# Altium PCB PCB-Mod.PcbDoc (part 2 of 2)
Units mil, origin at the board's own origin, x right, y up, seen from the top; angles counter-clockwise.
Board outline 2755.91 x 1181.1 mil, 4 copper layers (Top Layer, Layer 2, Layer 3, Bottom Layer), stack 61.865 mil thick; 89 components, 59 nets, 279 pads, 158 vias.
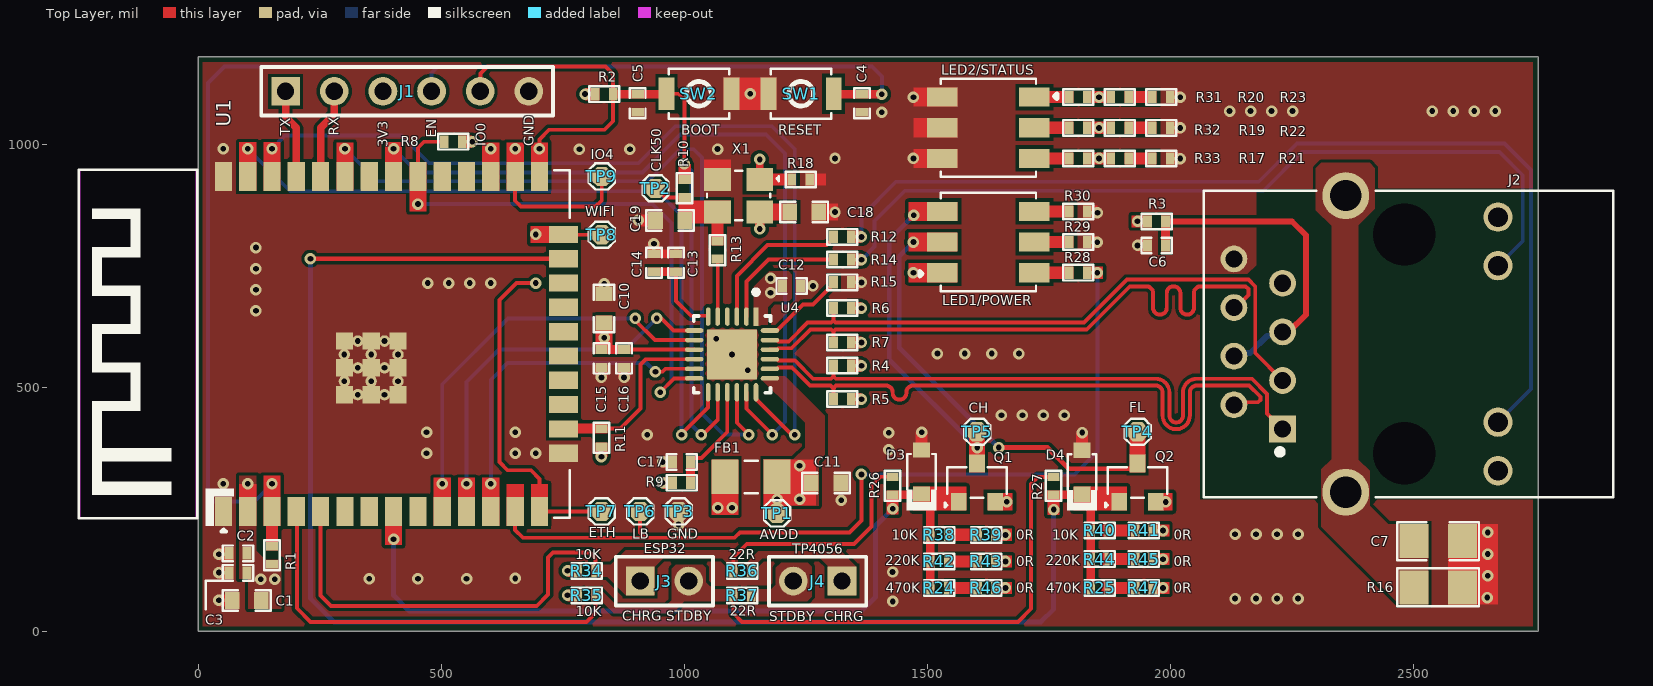
[diagram p0: Top Layer view]

## Part data (continued)
R24 R25: library part RC0402FR-07470KL, "RES 470K OHM 1% 1/16W 0402", Case Code (Imperial)=0402, Case Code (Metric)=1005, LCSC Part Number=C137976, Manufacturer=Yageo, Max Operating Temperature=155°C, Max Power Dissipation=63mW, Min Operating Temperature=-55°C, Package Quantity=1, Power Rating=62.5mW, Resistance Tolerance=1%, Resistor Type="Thick Film", Supplier Part Number=7702467, Temperature Coefficient=100ppm/°C, Voltage Rating=50V, Case/Package=0402, Category="Chip SMD Resistors", ComponentLink1Description=https://datasheet.ciiva.com/11819/0900766b80c66297-11819514.pdf?src-supplier=Rs, ComponentLink1URL=https://datasheet.ciiva.com/11819/0900766b80c66297-11819514.pdf?src-supplier=Rs, ComponentLink2Description=https://datasheet.ciiva.com/46412/1018594-46412837.pdf?src-supplier=Element14, ComponentLink2URL=https://datasheet.ciiva.com/46412/1018594-46412837.pdf?src-supplier=Element14, ComponentLink3Description=https://datasheet.ciiva.com/2453/pyu-r-int-thick-7-2453434.pdf?src-supplier=Digi-Key, ComponentLink3URL=https://datasheet.ciiva.com/2453/pyu-r-int-thick-7-2453434.pdf?src-supplier=Digi-Key, ComponentLink4Description=https://datasheet.ciiva.com/2453/pyu-r-int-thick-7-2453435.pdf?src-supplier=Digi-Key, ComponentLink4URL=https://datasheet.ciiva.com/2453/pyu-r-int-thick-7-2453435.pdf?src-supplier=Digi-Key, ComponentLink5Description=https://datasheet.ciiva.com/2453/pyu-r-int-thick-7-2453433.pdf?src-supplier=Digi-Key, ComponentLink5URL=https://datasheet.ciiva.com/2453/pyu-r-int-thick-7-2453433.pdf?src-supplier=Digi-Key, ComponentLink6Description=https://datasheet.ciiva.com/7850/1018594-7850012.pdf?src-supplier=Element14, ComponentLink6URL=https://datasheet.ciiva.com/7850/1018594-7850012.pdf?src-supplier=Element14, ComponentLink7Description=https://datasheet.ciiva.com/7850/1018594-7850013.pdf?src-supplier=Element14, ComponentLink7URL=https://datasheet.ciiva.com/7850/1018594-7850013.pdf?src-supplier=Element14, ComponentLink8Description=https://datasheet.ciiva.com/15189/getdatasheetpartid-325138-15189462.pdf?src-supplier=Verical, ComponentLink8URL=https://datasheet.ciiva.com/15189/getdatasheetpartid-325138-15189462.pdf?src-supplier=Verical, Construction=Rectangular, Depth=0.5mm, Features="Moisture Resistant", Height=0.016inch, Item Type=Resistor, Lead Free=5697LeadFree, Length=0.039inch, Manufacturer Part Number=RC0402FR-07470KL, Military Standard=Not, Number of Terminations=2, Packaging="Tape and Reel", Pins=2, Pricing="10000=0.0009, 50000=0.0008, 300000=0.0008, 1000000=0.0007, 3000000=0.0007 (USD)", Reach SVHC Compliant=No, RoHS=Yes, RoHS Compliant=Yes, Series=RC, Stock=330000, Supplier="Future Electronics", Technology="THICK FILM", Termination=SMD/SMT, Tolerance=1%, Voltage Rating (AC)=50V, Voltage Rating (DC)=50V, Width=0.02inch
R28 R29 R30 R31 R32 R33: library part RC0402FR-07100RL, "RES 100 OHM 1% 1/16W 0402", Case Code (Imperial)=0402, Case Code (Metric)=1005, LCSC Part Number=C106232, Manufacturer=Yageo, Max Operating Temperature=155°C, Max Power Dissipation=63mW, Min Operating Temperature=-55°C, Power Rating=62.5mW, Resistance Tolerance=1%, Resistor Type="Thick Film", Supplier Part Number 1=603-RC0402FR-07100RL, Temperature Coefficient=100ppm/°C, Voltage Rating=50V, Case/Package=0402, Category="Chip SMD Resistors", ComponentLink1Description=https://datasheet.ciiva.com/11808/0900766b80c66297-11808765.pdf?src-supplier=RSComponents, ComponentLink1URL=https://datasheet.ciiva.com/11808/0900766b80c66297-11808765.pdf?src-supplier=RSComponents, ComponentLink2Description=https://datasheet.ciiva.com/7849/1784430-7849810.pdf?src-supplier=Element14, ComponentLink2URL=https://datasheet.ciiva.com/7849/1784430-7849810.pdf?src-supplier=Element14, ComponentLink3Description=https://datasheet.ciiva.com/28367/1018594-28367226.pdf?src-supplier=Element14, ComponentLink3URL=https://datasheet.ciiva.com/28367/1018594-28367226.pdf?src-supplier=Element14, ComponentLink4Description=https://datasheet.ciiva.com/22747/1018594-22747511.pdf?src-supplier=Element14, ComponentLink4URL=https://datasheet.ciiva.com/22747/1018594-22747511.pdf?src-supplier=Element14, ComponentLink5Description=https://datasheet.ciiva.com/12667/pyu-rc0402-51-rohs-l-6-r-12667957.pdf?src-supplier=Mouser, ComponentLink5URL=https://datasheet.ciiva.com/12667/pyu-rc0402-51-rohs-l-6-r-12667957.pdf?src-supplier=Mouser, ComponentLink6Description=https://datasheet.ciiva.com/15189/getdatasheetpartid-329466-15189335.pdf?src-supplier=Verical, ComponentLink6URL=https://datasheet.ciiva.com/15189/getdatasheetpartid-329466-15189335.pdf?src-supplier=Verical, ComponentLink7Description=https://datasheet.ciiva.com/16740/pyu-rc0402-51-rohs-l-6-r-16740566.pdf?src-supplier=Future+Electronics, ComponentLink7URL=https://datasheet.ciiva.com/16740/pyu-rc0402-51-rohs-l-6-r-16740566.pdf?src-supplier=Future+Electronics, Construction=Rectangular, Depth=0.5mm, Features="Moisture Resistant", Height=0.32mm, Item Type=Resistor, Lead Free="Lead Free", Length=1mm, Manufacturer Part Number=RC0402FR-07100RL, Military Standard=Not, Number of Pins=2, Number of Terminations=2, Packaging="Tape and Reel", Pricing 1="1=0.10000, 10=0.01200, 50=0.01200, 100=0.00500, 1000=0.00300, 2500=0.00200, 10000=0.00100 (USD)", REACH SVHC="No SVHC", Resistance=100R, RoHS=Yes, RoHS Compliant=Yes, Series=RC, Size Code=0402, Stock 1=699545, Supplier 1=Mouser, Technology="THICK FILM", Termination=SMD/SMT, Tolerance=1%, Voltage Rating (DC)=50V, Width=0.5mm
R34 R35: library part RC0402FR-07100KL, "RES 100K OHM 1% 1/16W 0402", Case Code (Imperial)=0402, Case Code (Metric)=1005, LCSC Part Number=C60491, Manufacturer=Yageo, Max Operating Temperature=155°C, Max Power Dissipation=63mW, Min Operating Temperature=-55°C, Package Quantity=1, Resistance=100kR, Resistance Tolerance=1%, Resistor Type="Thick Film", Supplier Part Number 1=603-RC0402FR-07100KL, Temperature Coefficient=100ppm/°C, Voltage Rating=50V, Case/Package=0402, Category="Chip SMD Resistors", ComponentLink1Description=https://datasheet.ciiva.com/11819/0900766b80c66297-11819452.pdf?src-supplier=RSComponents, ComponentLink1URL=https://datasheet.ciiva.com/11819/0900766b80c66297-11819452.pdf?src-supplier=RSComponents, ComponentLink2Description=https://datasheet.ciiva.com/22747/1018594-22747509.pdf?src-supplier=Element14, ComponentLink2URL=https://datasheet.ciiva.com/22747/1018594-22747509.pdf?src-supplier=Element14, ComponentLink3Description=https://datasheet.ciiva.com/2453/pyu-r-int-thick-7-2453362.pdf?src-supplier=Digi-Key, ComponentLink3URL=https://datasheet.ciiva.com/2453/pyu-r-int-thick-7-2453362.pdf?src-supplier=Digi-Key, ComponentLink4Description=https://datasheet.ciiva.com/2453/pyu-r-int-thick-7-2453363.pdf?src-supplier=Digi-Key, ComponentLink4URL=https://datasheet.ciiva.com/2453/pyu-r-int-thick-7-2453363.pdf?src-supplier=Digi-Key, ComponentLink5Description=https://datasheet.ciiva.com/2453/pyu-r-int-thick-7-2453361.pdf?src-supplier=Digi-Key, ComponentLink5URL=https://datasheet.ciiva.com/2453/pyu-r-int-thick-7-2453361.pdf?src-supplier=Digi-Key, ComponentLink6Description=https://datasheet.ciiva.com/12667/pyu-rc0402-51-rohs-l-6-r-12667930.pdf?src-supplier=Mouser, ComponentLink6URL=https://datasheet.ciiva.com/12667/pyu-rc0402-51-rohs-l-6-r-12667930.pdf?src-supplier=Mouser, ComponentLink7Description=https://datasheet.ciiva.com/15189/getdatasheetpartid-323696-15189334.pdf?src-supplier=Verical, ComponentLink7URL=https://datasheet.ciiva.com/15189/getdatasheetpartid-323696-15189334.pdf?src-supplier=Verical, Construction=Rectangular, Depth=0.5mm, Features="Moisture Resistant", Height=0.016inch, Item Type=Resistor, Lead Free="Lead Free", Length=0.039inch, Manufacturer Part Number=RC0402FR-07100KL, Military Standard=Not, Number of Terminations=2, Packaging="Tape and Reel", Power Rating=63mW, Pricing 1="1=0.10000, 10=0.01200, 50=0.01200, 100=0.00500, 1000=0.00300, 2500=0.00200, 10000=0.00100 (USD)", REACH SVHC="No SVHC", RoHS=Yes, RoHS Compliant=Yes, Series=RC, Stock 1=7759549, Supplier 1=Mouser, Technology="THICK FILM", Termination=SMD/SMT, Tolerance=1%, Width=0.02inch, Working Voltage=50V
R36 R37: library part RC0402FR-0722RL, "RES 22 OHM 1% 1/16W 0402", Case Code (Imperial)=0402, Case Code (Metric)=1005, LCSC Part Number=C114765, Manufacturer=Yageo, Max Operating Temperature=155°C, Max Power Dissipation=63mW, Min Operating Temperature=-55°C, Power Rating=62.5mW, Resistance Tolerance=1%, Resistor Type="Thick Film", Temperature Coefficient=100ppm/°C, Voltage Rating=50V, Case/Package=0402, Category="Chip SMD Resistors", ComponentLink1Description=https://datasheet.ciiva.com/11819/0900766b80c66297-11819462.pdf?src-supplier=RSComponents, ComponentLink1URL=https://datasheet.ciiva.com/11819/0900766b80c66297-11819462.pdf?src-supplier=RSComponents, ComponentLink2Description=https://datasheet.ciiva.com/7849/1018594-7849912.pdf?src-supplier=Element14, ComponentLink2URL=https://datasheet.ciiva.com/7849/1018594-7849912.pdf?src-supplier=Element14, ComponentLink3Description=https://datasheet.ciiva.com/7849/1018594-7849911.pdf?src-supplier=Element14, ComponentLink3URL=https://datasheet.ciiva.com/7849/1018594-7849911.pdf?src-supplier=Element14, ComponentLink4Description=https://datasheet.ciiva.com/16930/pyu-rc0402-51-rohs-l-6-r-16930687.pdf?src-supplier=Future+Electronics, ComponentLink4URL=https://datasheet.ciiva.com/16930/pyu-rc0402-51-rohs-l-6-r-16930687.pdf?src-supplier=Future+Electronics, ComponentLink5Description=https://datasheet.ciiva.com/26829/getdatasheetpartid-554995-26829991.pdf?src-supplier=Verical, ComponentLink5URL=https://datasheet.ciiva.com/26829/getdatasheetpartid-554995-26829991.pdf?src-supplier=Verical, Construction=Rectangular, Depth=0.5mm, Features="Moisture Resistant", Height=0.32mm, Item Type=Resistor, Lead Free="Lead Free", Length=1mm, Manufacturer Part Number=RC0402FR-0722RL, Military Standard=Not, Number of Pins=2, Number of Terminations=2, Packaging="Tape and Reel", Pricing 1="10000=0.00085 (USD)", Reach SVHC Compliant=Yes, Resistance=22R, RoHS=Yes, RoHS Compliant=Yes, Series=RC, Size Code=0402, Stock 1=1810000, Supplier 1=Avnet, Supplier Part Number 1=RC0402FR-0722RL, Technology="THICK FILM", Termination=SMD/SMT, Tolerance=1%, Voltage Rating (DC)=50V, Width=0.5mm
R42 R44: library part RC0402FR-07220KL, "RES 220K OHM 1% 1/16W 0402", Case Code (Imperial)=0402, Case Code (Metric)=1005, LCSC Part Number=C138030, Manufacturer=Yageo, Max Operating Temperature=155°C, Max Power Dissipation=63mW, Min Operating Temperature=-55°C, Package Quantity=1, Power Rating=62.5mW, Resistance=220kR, Resistance Tolerance=1%, Resistor Type="Thick Film", Temperature Coefficient=100ppm/°C, Voltage Rating=50V, Case/Package=0402, Category="Chip SMD Resistors", ComponentLink1Description=https://datasheet.ciiva.com/11808/0900766b80c66297-11808792.pdf?src-supplier=RSComponents, ComponentLink1URL=https://datasheet.ciiva.com/11808/0900766b80c66297-11808792.pdf?src-supplier=RSComponents, ComponentLink2Description=https://datasheet.ciiva.com/5924/1018594-5924944.pdf?src-supplier=Farnell, ComponentLink2URL=https://datasheet.ciiva.com/5924/1018594-5924944.pdf?src-supplier=Farnell, ComponentLink3Description=https://datasheet.ciiva.com/2453/pyu-r-int-thick-7-2453533.pdf?src-supplier=Digi-Key, ComponentLink3URL=https://datasheet.ciiva.com/2453/pyu-r-int-thick-7-2453533.pdf?src-supplier=Digi-Key, ComponentLink4Description=https://datasheet.ciiva.com/2453/pyu-r-int-thick-7-2453534.pdf?src-supplier=Digi-Key, ComponentLink4URL=https://datasheet.ciiva.com/2453/pyu-r-int-thick-7-2453534.pdf?src-supplier=Digi-Key, ComponentLink5Description=https://datasheet.ciiva.com/2453/pyu-r-int-thick-7-2453532.pdf?src-supplier=Digi-Key, ComponentLink5URL=https://datasheet.ciiva.com/2453/pyu-r-int-thick-7-2453532.pdf?src-supplier=Digi-Key, ComponentLink6Description=https://datasheet.ciiva.com/12577/pyu-rc0402-51-rohs-l-6-r-12577270.pdf?src-supplier=Mouser, ComponentLink6URL=https://datasheet.ciiva.com/12577/pyu-rc0402-51-rohs-l-6-r-12577270.pdf?src-supplier=Mouser, Construction=Rectangular, Depth=0.5mm, Features="Moisture Resistant", Height=0.016inch, Item Type=Resistor, Lead Free="Lead Free", Length=1mm, Manufacturer Part Number=RC0402FR-07220KL, Military Standard=Not, Number of Terminations=2, Packaging="Tape and Reel", Pricing 1="10000=0.00130 (USD)", Reach SVHC Compliant=Yes, RoHS=Yes, RoHS Compliant=Yes, Series=RC, Size Code=0402, Stock 1=210000, Supplier 1="Arrow Electronics", Supplier Part Number 1=RC0402FR-07220KL, Technology="THICK FILM", Termination=SMD/SMT, Tolerance=1%, Weight=2.3E-05oz, Width=0.02inch
SW1 SW2: "SWITCH TACTILE SPST-NO 0.05A 12V", Contact Current Rating=50mA, Contact Resistance=100mR, Insulation Resistance=100MR, LCSC Part Number=C231329, Manufacturer=Omron, Max Operating Temperature=70°C, Max Voltage Rating (DC)=12V, Min Operating Temperature=-25°C, Operating Force=1.5N, Package Quantity=1, Ratings="Dust Proof,IP40", Supplier Part Number 1=SW1020DKR-ND, Actuator Length=0.4mm, Actuator Type=Standard, ComponentLink1Description=http://www.farnell.com/datasheets/60838.pdf?src-supplier=Farnell, ComponentLink1URL=http://www.farnell.com/datasheets/60838.pdf?src-supplier=Farnell, ComponentLink2Description=http://www.farnell.com/datasheets/60838.pdf?src-supplier=Element14, ComponentLink2URL=http://www.farnell.com/datasheets/60838.pdf?src-supplier=Element14, ComponentLink3Description=https://omronfs.omron.com/en_US/ecb/products/pdf/en-b3u.pdf?src-supplier=Digi-Key, ComponentLink3URL=https://omronfs.omron.com/en_US/ecb/products/pdf/en-b3u.pdf?src-supplier=Digi-Key, ComponentLink4Description=http://www.omron.com/ecb/products/pdf/en-b3u.pdf?src-supplier=Digi-Key, ComponentLink4URL=http://www.omron.com/ecb/products/pdf/en-b3u.pdf?src-supplier=Digi-Key, ComponentLink5Description=https://www.distrelec.biz/Web/Downloads/he/et/B3U_eng_datasheet.pdf?mime=application%2Fpdf&src-supplier=Distrelec, ComponentLink5URL=https://www.distrelec.biz/Web/Downloads/he/et/B3U_eng_datasheet.pdf?mime=application%2Fpdf&src-supplier=Distrelec, ComponentLink6Description=http://www.onlinecomponents.com/productFiles/mf-OM/en-b3u.pdf?src-supplier=Onlinecomponents.com, ComponentLink6URL=http://www.onlinecomponents.com/productFiles/mf-OM/en-b3u.pdf?src-supplier=Onlinecomponents.com, ComponentLink7Description=https://www.verical.com/server-webapp/html/getDatasheet?partID=552554&src-supplier=Verical, ComponentLink7URL=https://www.verical.com/server-webapp/html/getDatasheet?partID=552554&src-supplier=Verical, ComponentLink8Description=http://www.farnell.com/datasheets/1685550.pdf?src-supplier=Element14, ComponentLink8URL=http://www.farnell.com/datasheets/1685550.pdf?src-supplier=Element14, ComponentLink9Description=http://www.farnell.com/datasheets/2610940.pdf?src-supplier=Farnell, ComponentLink9URL=http://www.farnell.com/datasheets/2610940.pdf?src-supplier=Farnell, ComponentLink10Description=https://www.alliedelec.com/m/d/4c8a9ef82804fc3c241a13c1e298fd73.pdf?src-supplier=Allied+Electronics, ComponentLink10URL=https://www.alliedelec.com/m/d/4c8a9ef82804fc3c241a13c1e298fd73.pdf?src-supplier=Allied+Electronics, Contact Material=Silver, Current Rating=50mA, Depth=2.5mm, Electrical Life=200000Cycles, Height=1.2mm, Illumination Type=Non-Illuminated,Illuminated, Item Type=Switch, Lead Free="Lead Free", Length=4mm, Manufacturer Part Number=B3U-1000P, Max Current Rating=50mA, Mechanical Life=200000Cycles, Mount="Surface Mount", Orientation=Straight, Packaging="Tape and Reel", Pricing 1="1=1, 10=0.961, 25=0.9064, 50=0.7976, 100=0.7251, 250=0.68888, 500=0.67074, 1000=0.52571 (USD)", REACH SVHC=Unknown, Stock 1=116454, Supplier 1=Digi-Key, Switch Function=Off-Mom, Switch Travel=0.15mm, Termination=SMD/SMT, Throw Configuration=SPST, Voltage Rating (DC)=12V, Weight=0.000776oz, Width=3mm
TP1 TP2 TP3 TP4 TP5 TP6 TP7 TP8 TP9: "Test Point ON", Item Type="Test Point", Manufacturer Part Number="TEST POINT 0.5mm Dia"
U1: "RX TXRX MOD WIFI TRACE ANT SMD", LCSC Part Number=C701341, Manufacturer="Espressif Systems", Supplier Part Number 1=1965-ESP32-WROOM-32E(4MB)CT-ND, ComponentLink1Description="LCSC Link", ComponentLink1URL=https://lcsc.com/product-detail/WiFi-Modules_ESPRESSIF-ESP32-WROOM-32E-N4_C701341.html, Manufacturer Part Number=ESP32-WROOM-32E-N4, Pricing 1="1=3.00000 (USD)", RoHS=No, Supplier 1=Digi-Key
U4: "IC TRANSCEIVER FULL 2/2 24SQFN", LCSC Part Number=C45223, Manufacturer=MICROCHIP, Max Operating Temperature=85°C, Min Operating Temperature=0°C, Package=QFN-24-EP(4x4), ComponentLink1Description="LCSC Link", ComponentLink1URL=https://www.lcsc.com/product-detail/C45223.html?s_z=n_LAN8720A, Item Type=RMII, Manufacturer Part Number=LAN8720A-CP-TR, Mount="Surface Mount", Packaging="Tape and Reel", Simplex/Duplex="Full Duplex"
X1: library part OT2EL4C4JI-111OLP-50M, "1.8V~3.3V ±10ppm ±20ppm CMOS 50MHz SMD3225-4P Crystal Oscillators ROHS", LCSC Part Number=C5203552, Manufacturer="YXC Crystal Oscillators", Package=SMD3225-4P, ComponentLink1Description="LCSC Link", ComponentLink1URL=https://lcsc.com/product-detail/Crystal-Oscillators_YXC-Crystal-Oscillators-OT2EL4C4JI-111OLP-50M_C5203552.html, Item Type=Crystal, Manufacturer Part Number=OT2EL4C4JI-111OLP-50M

## Via types
v1: diameter 23.62, hole 11.81, Top Layer to Bottom Layer, tented top, 157 vias
v2: diameter 23.62, hole 11.81, Top Layer to Bottom Layer, 1 vias

## Nets (pads, with @x,y where several pads share a name; then routed paths per layer and width w, separated by ;. In a path a pad name is that pad's centre, name@x,y a point inside that pad or via, vN(x,y) a via of type N, cw(c..) or ccw(c..) an arc to the next point about the centre after c; other vN are vias at no path point)
+3.3_OUT: C1.1 C2.2 C3.2 C10.2 C15.1 C16.1 C18.2 FB1.2 J1.3 LED1/POWER.1 Q1.2 Q2.2 R1.2 R2.2 R8.2 R9.2 R11.2 R34.2 R35.2 R39.1 R41.1 R43.1 R45.1 R46.1 R47.1 U1.2 U4.9 X1.4 | length 179.2
  Top Layer w8: C16.1 876.41,579.07 1019.99,579.07 U4.9
  Top Layer w20: v1(1154.76,826.98) X1.4
  other v1: 759.85,73.79 1660.15,88.68 1984.15,88.68 128.81,106.5 157.49,106.5 759.85,124.2 1660.15,143.18 1984.15,147.68 1660.15,197.68 1984.15,206.68 1068.97,253.68 1098,253.68 1662.6,265.89 1989.65,265.57 101.97,303.02 955.11,305.1 829.37,358.35 835,603.24 1471,737 563.59,1006.06 795.85,1104.43
AVDD: C11.2 C12.1 FB1.1 J2.9 J2.12 R3.2 R4.2 R5.2 R6.2 R7.2 TP1.1 U4.1 U4.19
  other v1: 1190.5,271 1236.78,271 1236.78,340.24 1364,476.7 1364,545.51 1364,593.5 1364,664 1177.25,695.78 1177.25,725.14 1931.85,842.84
CH: LED1/POWER.5 Q1.3 TP5.1 | length 605.8
  Top Layer w8: v1(1602,377.52) TP5.1
  Bottom Layer w10: v1(1471.81,855.05) 1421.24,804.48 1421.24,558.27 v1(1602,377.52)
CHG_LED: D3.1 Q1.1 R24.1 R26.2 R38.2 R42.1 U1.8 | length 1471.8
  Top Layer w8: R26.2 1486.11,280.5 D3.1 1517.87,281.98 1533.97,265.89 Q1.1
  Bottom Layer w10: v1(401.97,189.1) 401.97,73.4 434.37,41 1364,41 1393,70 1393,216.15 v1(1428.35,251.49)
CHRG: J3.1 R26.1 R34.1 R36.1 U1.5 | length 1342
  Top Layer w8: U1.5 251.97,73.03 273,52 696.46,52 719.69,75.22 719.69,151.69 730,162 806.06,162 817.5,150.56 R34.1 ; R36.1 1100.5,151.48 1128.21,179.19 1348.92,179.19 1385,215.27 1385,299 1403.5,317.5 R26.1
CLK50M: C19.2 R10.1 R13.1 TP2.1 X1.3 | length 67.7
  Top Layer w8: TP2.1 942.44,910.39 960.94,891.89 R10.1
EN: C4.1 J1.4 R1.1 SW1.2 U1.3 | length 2541.6
  Top Layer w8: C4.1 v1(1406,1104.11)
  Bottom Layer w8: v1(151.97,303.02) 115.78,266.84 33.59,266.84 20,280.42 20,1127 54,1161 493.12,1161 ; J1.4 480,1147.88 493.12,1161 ; v1(1406,1104.11) 1406,1140.61 1385.61,1161 493.12,1161
ETH2X_LED1: J2.10 R12.2 | length 2050.7
  Bottom Layer w8: v1(1364,810.51) 1364,852.54 1435.46,924 2181,924 2260,1003 2686,1003 2741.12,947.88 2741.12,497.81 J2.10
ETH2X_LED2: J2.11 R14.2 | length 1709.1
  Bottom Layer w8: v1(1364,763.51) 1391.27,790.77 1391.27,843.32 1453.46,905.51 2190.51,905.51 2270,985 2676,985 2724,937 2724,802.35 J2.11
ETHERNET: R20.2 R31.2 TP7.1 U1.14 | length 2226.3
  Top Layer w8: v1(694.22,715.75) 654.86,715.75 619.69,680.57 619.69,347.61 636.58,330.71 684.25,330.71 701.97,312.99 U1.14 TP7.1
  Layer 3 w8: v1(694.22,715.75) 694.22,773.93 834.3,914 1872.91,914 1904,945.09 1904,1046.7 v1(1852.71,1097.99)
FL: LED1/POWER.3 Q2.3 TP4.1 | length 859.4
  Top Layer w8: 1932,377.52 TP4.1
  Top Layer w10: v1(1646.62,377.52) 1746.45,377.52 1789.96,334.01 1920.98,334.01 Q2.3
  Bottom Layer w10: v1(1471,799.99) 1441.72,770.71 1441.72,582.41 v1(1646.62,377.52)
FULL_LED: D4.1 Q2.1 R25.1 R27.2 R40.2 R44.1 U1.23 | length 3125.9
  Top Layer w8: R27.2@1758,280.5 1816.11,280.5 1817.6,281.98 1847.87,281.98 1863.97,265.89 Q2.1
  Top Layer w10: v2(231,765.75) U1.23
  Bottom Layer w10: v2(231,765.75) 231,67.35 279.35,19 1733,19 1759.35,45.35 v1(1759.35,249.94)
GND: C1.2 C2.1 C3.1 C4.2 C5.2 C6.1 C7.1 C10.1 C11.1 C12.2 C13.1 C14.2 C15.2 C16.2 C17.1 C18.1 C19.1 D3.2 D4.2 J1.6 J2.8 LED2/STATUS.2 LED2/STATUS.4 LED2/STATUS.6 R15.1 R16.1 R18.2 R21.1 R22.1 R23.1 R29.2 R30.2 SW1.1 SW2.1 TP3.1 U1.1 U1.15 U1.38 U1.39 U1.39_10 U1.39_11 U1.39_12 U1.39_13 U1.39_14 U1.39_15 U1.39_16 U1.39_17 U1.39_18 U1.39_19 U1.39_20 U1.39_21 U1.40 U1.41 U1.42 U1.43 U1.44 U1.45 U1.46 U1.47 U4.25 X1.2
  other v1: 1428.35,60.97 42.85,63.32 2132.39,67 2175.59,67 2218.8,67 2262,67 2651,69 351.97,107.51 451.97,107.51 551.97,107.51 651.97,108.25 2652,113.67 42.85,120.32 1428.01,121.56 42.85,158.32 2652,158.33 2132.39,199 2175.59,199 2218.8,199 2262,199 2652,203 988.01,219.22 1322.66,268.92 51.97,303.02 955.11,347.82 469.69,365.5 651.97,365.5 694.22,365.75 1420.44,372.54 923.76,404 1420.44,407.83 1817.91,408.2 469.69,408.7 651.97,408.7 1487.91,408.94 1651.94,444 1695.15,444 1738.35,444 1781.56,444 829.37,521.65 875.87,521.65 1130.37,536.63 1098,569 1520.4,570.72 1576.27,570.72 1632.13,570.72 1687.99,570.72 1065.63,601.37 119,659 119,702.2 1264.41,709.89 835,714.26 472.36,715.75 515.56,715.75 558.76,715.75 601.97,715.75 1364,717.01 119,745.41 119,788.61 1931.85,793.19 937.42,796.68 1849.15,799.68 904.92,844.8 1849.37,860.19 1309.67,861.77 1309.67,972.01 1471,972 2019.65,971.69 784.2,991 888.04,991 1068.14,991.2 51.97,992 2019.65,1034.68 1406,1067.11 2120.92,1069.5 2164.13,1069.5 2207.33,1069.5 2250.53,1069.5 2537.91,1069.5 2581.11,1069.5 2624.32,1069.5 2667.52,1069.5 1471,1097.98 2019.65,1097.68 1135.51,1105
IO0: C5.1 J1.5 R2.1 R10.2 SW2.2 U1.25 U4.14 | length 1543
  Top Layer w8: J1.5 580.84,1110.84 580.84,1146.84 595,1161 837.75,1161 853.5,1145.25 R2.1 853.5,1048.5 836,1031 721.65,1031 701.97,1011.32 U1.25 ; SW2.2 987.43,1105 1000.57,1091.85 R10.2 ; v1(1034.43,404) 1038.34,404 1068.47,434.13 U4.14
  Bottom Layer w8: v1(1000,961) 1014.57,946.43 1014.57,423.86 v1(1034.43,404)
  other v1: 701.97,992
IO4: R17.2 R33.2 TP9.1 U1.26 | length 1539.5
  Top Layer w8: U1.26 651.97,885.03 664,873 817.39,873 830,885.61 TP9.1
  Layer 3 w8: v1(651.97,992) 702.8,1042.83 1783.1,1042.83 1852.71,973.23 v1(1852.71,972.01)
IO13_RMII_EMAC_RX_ER: R11.1 U1.16 U4.10 | length 338.9
  Top Layer w8: 796.68,416.5 829.69,416.5 868.5,416.5 910,458 910,548.03 921.13,559.16 U4.10 ; R11.1 R11.1@833.19,416
IO16_OSC_EN: R18.1 U1.27 X1.1 | length 653.1
  Top Layer w15: X1.1 v1(1154.76,970)
  Layer 3 w8: v1(601.97,992) 631.96,962.01 711.01,962.01 771.51,1022.51 1102.25,1022.51 v1(1154.76,970)
IO18_RMII_MDIO: R8.1 U1.30 U4.12 | length 1094.6
  Top Layer w8: U1.30 451.97,993.88 464.47,1006.38 R8.1 ; v1(950.35,491.22) 978.91,519.79 U4.12
  Bottom Layer w8: v1(451.97,878.08) 934.17,878.08 973.41,838.84 973.41,514.29 v1(950.35,491.22)
IO19_RMII_EMAC_TXD0: U1.31 U4.17 | length 1572.4
  Top Layer w8: U4.17 1127.53,457.18 v1(1180.71,404)
  Bottom Layer w8: v1(401.97,992) 450.88,943.09 913.46,943.09 991.55,1021.17 1168.2,1021.17 1207.21,982.16 1207.21,430.5 v1(1180.71,404)
IO21_RMII_EMAC_TX_EN: U1.33 U4.16 | length 1533.6
  Top Layer w8: U4.16 1107.84,428.4 v1(1132.24,404)
  Bottom Layer w8: v1(301.97,992) 368.81,925.16 924.85,925.16 990.63,990.94 1018.7,990.94 1036,973.64 1036,447.88 1079.88,404 v1(1132.24,404)
IO22_RMII_EMAC_TXD1: U1.36 U4.18 | length 1872.3
  Top Layer w8: U4.18 1147.21,477.01 1220.23,404 v1(1227.03,404)
  Bottom Layer w8: v1(151.97,992) 179.11,1019.14 417.86,1019.14 474.99,962.01 905.92,962.01 982.04,1038.13 1179.87,1038.13 1227.03,990.97 v1(1227.03,404)
IO23_RMII_MDC: U1.37 U4.13 | length 1509.4
  Top Layer w8: v1(994.27,404) 994.27,405.45 1048.79,459.97 U4.13
  Bottom Layer w8: v1(101.97,992) 189.55,904.42 944.13,904.42 994.27,854.29 v1(994.27,404)
IO25_RMII_EMAC_RXD0: U1.10 U4.8 | length 799.7
  Top Layer w8: v1(899,643) 899,639 939.47,598.53 U4.8
  Bottom Layer w8: v1(501.97,303.02) 501.97,507.69 637.28,643 v1(899,643)
IO26_RMII_EMAC_RXD1: U1.11 U4.7 | length 731.9
  Top Layer w8: v1@953,643 977.79,618.21 U4.7
  Bottom Layer w8: v1(551.97,303.02) 551.97,512.17 618.8,579 879,579 v1(943,643)
IO27_RMII_EMAC_CRS_DV: U1.12 U4.11 | length 646.4
  Top Layer w8: v1@950.35,533.3 954.57,533.3 960.75,539.47 U4.11
  Bottom Layer w8: v1(601.97,303.02) 601.97,516.88 636.38,551.3 922.35,551.3 v1(940.35,533.3)
"LOW BATT": R28.2 TP6.1 U1.13 | length 1796.8
  Top Layer w8: U1.13 651.97,208.03 668,192 1103,192 1114,203 1339.76,203 1364,227.24 v1(1364,322.28) ; TP6.1 909,202.89 919.89,192
  Bottom Layer w8: v1(1364,322.28) 1801.86,322.28 1849.15,369.57 v1(1849.15,736.69)
NetC6_2: C6.2 J2.4 J2.5 R3.1 | length 647
  Top Layer w12: R3.1 2249.48,842.52 2278,814 2278,650.51 2242.85,615.35 J2.5
  Bottom Layer w12: J2.4 2136.89,572.13 2163.23,572.13 2198.34,607.24 2222,607.24 J2.5
NetC7_2: "J2.Shield 1" "J2.Shield 2" C7.2 R16.2
NetJ4_1: J4.1 R36.2
NetJ4_2: J4.2 R37.2
NetLED1_2: LED1/POWER.2 R28.1 | length 72.1
  Top Layer w8: LED1/POWER.2@1719.38,737.01 R28.1
NetLED1_4: LED1/POWER.4 R29.1 | length 72.1
  Top Layer w8: LED1/POWER.4@1719.38,800 R29.1
NetLED1_6: LED1/POWER.6 R30.1 | length 72.1
  Top Layer w8: LED1/POWER.6@1719.38,862.99 R30.1
NetLED2_1: LED2/STATUS.1 R31.1 | length 72.1
  Top Layer w8: LED2/STATUS.1 R31.1
NetLED2_3: LED2/STATUS.3 R32.1 | length 72.1
  Top Layer w8: LED2/STATUS.3 R32.1
NetLED2_5: LED2/STATUS.5 R33.1 | length 44.1
  Top Layer w8: LED2/STATUS.5 1760.05,972.01 ; R33.1 R33.1@1791.61,975.51
NetR12_1: R12.1 U4.3 | length 317.4
  Top Layer w8: U4.3 1107.84,730.29 1171.17,793.61 1292.64,793.61 1306.35,807.32 R12.1
NetR14_1: R14.1 U4.2 | length 269.5
  Top Layer w8: U4.2 1127.53,718.8 1172.55,763.82 R14.1
NetR15_2: R15.2 U4.24 | length 173.2
  Top Layer w8: U4.24 1190.35,618.21 1243.82,671.68 1264.05,671.68 1301.2,708.82 1301.35,708.82 1306.03,713.51 R15.2@1306.03,717.01
NetR17_1: R17.1 R21.2 | length 48.2
  Top Layer w8: R17.1 R21.2
NetR19_1: R19.1 R22.2 | length 48.2
  Top Layer w8: R19.1 R22.2
NetR20_1: R20.1 R23.2 | length 48.2
  Top Layer w8: R20.1 R23.2
NetR24_2: R24.2 R46.2 | length 60
  Top Layer w8: R24.2 R46.2
NetR25_2: R25.2 R47.2 | length 54
  Top Layer w8: R25.2 R47.2
NetR38_1: R38.1 R39.2 | length 60
  Top Layer w8: R38.1 R39.2
NetR40_1: R40.1 R41.2 | length 54
  Top Layer w8: R40.1 R41.2
NetR42_2: R42.2 R43.2 | length 60
  Top Layer w8: R42.2 R43.2
NetR44_2: R44.2 R45.2 | length 54
  Top Layer w8: R44.2 R45.2
nRST: C17.2 R9.1 U4.15 | length 185
  Top Layer w8: C17.2 1012.77,351 1017.77,356 1035,356 1088.16,409.16 U4.15
OSCIN: R13.2 U4.5 | length 118.3
  Top Layer w8: R13.2 1068.47,764.62 U4.5
RX_N: J2.6 R7.1 U4.22 | length 1303.6
  Top Layer w8: U4.22 1190.37,578.84 1193.21,581.68 1220.45,581.68 1259.27,620.51 1301.66,620.51 1306.35,615.82 ; R7.1 1306.35,615.82 ; J2.6 2133.94,665.35 2159.8,691.21 2159.8,703.24 2154.04,709 2095.7,709 2061.8,709 ccw(c2061.8,695) 2047.8,695 2047.8,664.74 cw(c2033.8,664.74) 2019.8,664.74 2019.8,695 ccw(c2005.8,695) 1991.8,695 1991.8,664.74 cw(c1977.8,664.74) 1963.8,664.74 1963.8,695 ccw(c1949.8,695) 1949.8,709 1917.8,709 1915.8,709 1827.31,620.51 1311.03,620.51 1306.35,615.82
RX_P: J2.3 R6.1 U4.23 | length 1303.7
  Top Layer w8: U4.23 1190.37,598.53 1193.21,595.68 1214.65,595.68 1253.47,634.51 1301.66,634.51 1306.35,639.2 ; R6.1 1306.35,639.2 ; J2.3 2173.8,571.67 2173.8,709.04 2159.84,723 1981.22,723 1910,723 1864.87,677.87 1821.51,634.51 1311.03,634.51 1306.35,639.2
RXD: J1.2 U1.34 | length 186.6
  Top Layer w15: U1.34 251.97,1035 280,1063.03 J1.2
STDBY: J3.2 R27.1 R35.1 R37.1 U1.4 | length 1845.7
  Top Layer w8: U1.4 203,245.03 203,47 231,19 799,19 817.5,37.5 R35.1 ; R37.1 1100.5,37 1118.5,19 1686,19 1713,46 1713,303 1727.23,317.23 R27.1
TX_N: J2.2 R5.1 U4.20 | length 1303.8
  Top Layer w8: U4.20 1190.37,539.47 1193.21,542.31 1221.23,542.31 1258.61,504.93 1300.83,504.93 1306.49,499.27 ; R5.1 1306.35,495.56 1306.4,495.61 1306.4,499.19 1312.09,504.87 1382.35,504.87 1414.35,504.87 cw(c1414.35,490.87) 1428.35,490.87 1428.35,490 ccw(c1442.35,490) 1456.35,490 1456.35,490.87 cw(c1470.35,490.87) 1470.35,504.87 1499.74,504.87 1899.54,504.87 1969.31,504.87 cw(c1969.31,490.87) 1983.31,490.87 1983.31,443.15 ccw(c2011.31,443.15) 2039.31,443.15 2039.31,490.87 cw(c2053.31,490.87) 2053.31,504.87 2064.31,504.87 2161.34,504.87 2184.33,481.89 2184.33,475.26 2179.64,470.57 2135.34,470.57 J2.2
TX_P: J2.1 R4.1 U4.21 | length 1310.8
  Top Layer w8: U4.21 1190.37,559.16 1193.21,556.31 1227.03,556.31 1264.41,518.93 1301.66,518.93 1306.35,523.62 1306.35,527.29 ; R4.1 1306.35,527.29 ; J2.1 2206.6,438.87 2198.33,447.14 2198.33,487.69 2167.14,518.87 2064.31,518.87 2053.31,518.87 ccw(c2053.31,490.87) 2025.31,490.87 2025.31,443.15 cw(c2011.31,443.15) 1997.31,443.15 1997.31,490.87 ccw(c1969.31,490.87) 1969.31,518.87 1899.54,518.87 1376.55,518.87 1311.18,518.87 1306.4,523.66 1306.4,527.23 1306.35,527.29
TXD: J1.1 U1.35 | length 184.1
  Top Layer w15: J1.1 180,1056.97 201.97,1035 U1.35
VDDCR: C13.2 C14.1 U4.6 | length 139.8
  Top Layer w8: C13.2 983.07,678.61 1013.07,648.61 1048.13,648.61 1048.79,647.95 U4.6
WIFI: R19.2 R32.2 TP8.1 U1.24 | length 1417.4
  Top Layer w8: U1.24 751.93,815 TP8.1
  Layer 3 w8: v1(694.22,815.75) 812.13,933.66 1860.56,933.66 1882.91,956.01 1882.91,1004.8 v1@1852.71,1035
  other v1: 1852.71,1034.68
pads on no net: J2.7 J2.MH1 J2.MH2 U1.6 U1.7 U1.9 U1.17 U1.18 U1.19 U1.20 U1.21 U1.22 U1.28 U1.29 U1.32 U4.4

## Polygon pours and split planes (outlines as drawn)
GND on Top Layer "NONET_L-01_P-001" (solid, pour order 25): 2175.45,910 2175.45,752.63 2157.64,734.81 2060,734.81 2060,270 2295,270 2335,230 2385,230 2425,270 2745,270 2745,10 10,10 10,1170 2745,1170 2745,911 2428.17,911 2389.17,950 2330.91,950 2290.91,910
+3.3_OUT on Top Layer "NONET_L-01_P-001" (solid, pour order 13): 84.25,186.77 84.25,319.65 119.69,319.65 119.69,164.89 138.07,146.5 171.38,146.5 171.38,45.5 103.44,45.5 103.01,107.51 84.25,107.51
GND on Top Layer "NONET_L-01_P-001" (solid, pour order 28): 33.02,904.7 33.83,905.51 69.69,905.51 69.69,1005.45 34.25,1005.45 34.25,905.51
GND on Top Layer "NONET_L-01_P-001" (solid, pour order 27): 781.52,346.8 780.71,347.61 780.71,383.46 694.22,383.46 694.22,348.03 780.71,348.03
GND on Top Layer "NONET_L-01_P-001" (solid, pour order 26): 33.02,215.72 33.83,216.54 69.69,216.54 69.69,319.65 34.25,319.65 34.25,216.54
AVDD on Top Layer "NONET_L-01_P-001" (solid, pour order 20): 1171.17,665.67 1183.33,677.83 1214.99,677.83 1221.23,684.07 1221.23,733.13 1214.22,740.14 1174.76,740.14 1142.5,707.89 1142.5,627.86 1171.17,627.86
AVDD on Top Layer "NONET_L-01_P-001" (solid, pour order 21): 1248.49,428.15 1248.49,377.47 1224.13,353.11 1162.99,353.11 1162.99,258.21 1276.16,258.21 1276.16,349.55 1289.07,362.47 1289.07,443 1207.58,524.5 1161.57,524.5 1161.57,515.08 1219.52,457.13
NetC7_2 on Top Layer "NONET_L-01_P-001" (solid, pour order 19): 2466,59 2470,55 2530,55 2530,220 2447,220 2409,258 2409,329.76 2386,352.76 2386,834.45 2420,868.45 2420,952 2409,963 2310,963 2310,962.69 2298.77,951.46 2298.77,865.23 2330.91,833.09 2330.91,353.91 2310,333 2310,215
STDBY on Top Layer "NONET_L-01_P-001" (solid, pour order 8): 808.5,60.97 830.56,60.97 831.51,60.01 854.53,37 976,37 999.97,60.97 1109.5,60.97 1109.5,85.97 1058.92,85.97 1044.23,100.66 1044.23,129.84 1037.47,136.6 981.84,136.6 973.93,128.69 973.93,63.07 962.86,52 860.47,52 826.5,85.97 808.5,85.97
CHRG on Top Layer "NONET_L-01_P-001" (solid, pour order 7): 808.5,111.38 841.57,111.38 879.47,73.47 938.53,73.47 938.53,132.53 956,150 1077.88,150 1091.5,136.38 1091.5,111.38 1109.5,111.38 1109.5,147.5 1090.27,166.73 879.35,166.73 849,136.38 808.5,136.38
NetJ4_1 on Top Layer "NONET_L-01_P-001" (solid, pour order 9): 1294.47,73.47 1353.53,73.47 1353.53,132.53 1322.08,163.97 1151.47,163.97 1128.5,141 1128.5,111.38 1146.5,111.38 1146.5,136.38 1160.1,149.98 1279.34,149.98 1294.47,134.85 1294.47,132.53
NetJ4_2 on Top Layer "NONET_L-01_P-001" (solid, pour order 10): 1128.5,85.97 1178.66,85.97 1187.77,95.08 1187.77,129.9 1198.87,141 1253.53,141 1262.38,132.15 1262.38,71.1 1252.26,60.97 1128.5,60.97
AVDD on Layer 3 "NONET_L-01_P-001" (solid, pour order 15): 1393.92,604 2016,604 2060,648 2060,861.32 2161.68,963 2480.42,963 2561,882.42 2561,251.84 2755.91,251.84 2755.91,1033 2093,1033 1920,860 1915,855 1915,836 1923,828 1952,828 1957.65,822.35 1957.65,705.65 1936,684 1231.04,684 1225.42,689.62 1225.42,743.92 1142.5,743.92 1142.5,642.19 1164.18,620.51 1256,620.51 1256,452 1256,381 1170.63,295.63 1170.63,261.71 1180.5,251.84 1258.95,251.84 1393.92,386.82
+3.3_OUT on Layer 3 "NONET_L-01_P-001" (solid, pour order 18): 10,10 2745,10 2745,270 2425,270 2385,230 2335,230 2295,270 2060,270 2060,910 2290.91,910 2330.91,950 2389.17,950 2428.17,911 2745,911 2745,1170 10,1170
GND on Layer 2 "NONET_L-01_P-001" (solid, pour order 4): 2175.45,910 2175.45,752.63 2157.64,734.81 2060,734.81 2060,270 2295,270 2335,230 2385,230 2425,270 2745,270 2745,10 10,10 10,1170 2745,1170 2745,911 2428.17,911 2389.17,950 2330.91,950 2290.91,910

## Other copper
Top Layer:
  rectangle net +3.3_OUT: 1630.5,76.5 1673.35,101.5
  rectangle net +3.3_OUT: 1630.5,131 1673.35,156
  rectangle net +3.3_OUT: 1630.5,185.5 1673.35,210.5
  rectangle net +3.3_OUT: 1954.5,76.5 1997.35,101.5
  rectangle net +3.3_OUT: 1954.5,135.5 1997.35,160.5
  rectangle net FULL_LED: 1746.5,238.54 1771.5,287.95
  rectangle net CHG_LED: 1415.5,239.73 1440.5,289.5
  rectangle net FULL_LED: 1745.5,271.5 1770.06,289.5
  rectangle net FULL_LED: 1826.5,76.5 1844.5,281.98
  rectangle net FULL_LED: 1745.5,271.5 1816.11,289.5
  rectangle net FULL_LED: 1799.88,247.78 1910.34,296.99
  rectangle net CHG_LED: 1469.88,247.78 1580.34,297.73
  rectangle net CHG_LED: 1415.5,271.5 1486.11,289.5
  rectangle net CHG_LED: 1496.5,76.5 1514.5,281.98
  rectangle net +3.3_OUT: 817.19,579.3 852.19,648.61
  rectangle net +3.3_OUT: 817.19,570.3 888.69,588.3
  region net GND: 72.5,132.5 42.85,132.5 42.85,107.5 72.5,107.5
  region net GND: 72.5,170.5 42.85,170.5 42.85,145.5 72.5,145.5
  rectangle net GND: 978.03,219.25 997.74,252.12
  rectangle net ETHERNET: 684.25,216.54 719.69,303.02
  rectangle net "LOW BATT": 634.25,216.54 669.69,303.02
  rectangle net IO27_RMII_EMAC_CRS_DV: 584.25,216.54 619.69,315.38
  rectangle net IO26_RMII_EMAC_RXD1: 534.25,216.54 569.69,315.38
  rectangle net IO25_RMII_EMAC_RXD0: 484.25,216.54 519.69,315.38
  rectangle net CHG_LED: 1415.5,271.5 1440.06,289.5
  rectangle net IO0: 988.07,919.89 1013.07,961
  rectangle net GND: 2570,55 2673.03,220
  rectangle net GND: 924.61,767.03 949.61,796.68
  rectangle net +3.3_OUT: 84.25,216.54 119.69,303.02
  rectangle net EN: 134.25,216.54 169.69,319.65
  region net CHG_LED: 419.69,275.59 384.25,275.59 384.25,176.64 419.69,176.64
  region net WIFI: 780.71,798.03 780.71,833.46 683.31,833.46 683.31,798.03
  rectangle net IO0: 684.25,905.51 719.69,1004.76
  rectangle net IO4: 634.25,905.51 669.69,1004.76
  region net IO18_RMII_MDIO: 469.69,964.57 434.25,964.57 434.25,862.92 469.69,862.92
  rectangle net IO16_OSC_EN: 584.25,905.51 619.69,1004.76
  rectangle net IO19_RMII_EMAC_TXD0: 384.25,905.51 419.69,1005.36
  rectangle net IO21_RMII_EMAC_TX_EN: 284.25,905.51 319.69,1004.53
  rectangle net IO22_RMII_EMAC_TXD1: 134.25,905.51 169.69,1005.45
  rectangle net IO23_RMII_MDC: 84.25,905.51 119.69,1005.45
  rectangle net +3.3_OUT: 1055.9,238.98 1111.02,353.11
  rectangle net GND: 1040.58,905.29 1095.7,970
  rectangle net GND: 1261.35,844.48 1315.35,879.48
  rectangle net +3.3_OUT: 1461.12,717.32 1562.01,756.69
  rectangle net FL: 1461.12,780.31 1562.01,819.69
  rectangle net CH: 1461.12,843.31 1562.01,882.68
  rectangle net GND: 1471,952.32 1562.01,991.69
  rectangle net GND: 1471,1015.31 1562.01,1054.69
  rectangle net GND: 1471,1078.31 1562.01,1117.68
  rectangle net NetR40_1: 1857.5,194.5 1935.5,219.5
  rectangle net NetR44_2: 1857.5,135.5 1935.5,160.5
  rectangle net NetR25_2: 1857.5,76.5 1935.5,101.5
  rectangle net NetR38_1: 1533.5,185.5 1611.5,210.5
  rectangle net NetR42_2: 1533.5,131 1611.5,156
  rectangle net NetR24_2: 1533.5,76.5 1611.5,101.5
  region net GND: 85,75.5 42.85,75.5 42.85,50.5 85,50.5
  rectangle net +3.3_OUT: 1952.86,247.78 2003.91,284
  rectangle net +3.3_OUT: 1622.86,247.78 1675,284
  region net +3.3_OUT: 789.5,85.97 759.85,85.97 759.85,60.97 789.5,60.97
  region net +3.3_OUT: 789.5,136.38 759.85,136.38 759.85,111.38 789.5,111.38
  rectangle net ETH2X_LED1: 1334.35,798.32 1364,823.32
  rectangle net ETH2X_LED2: 1334.35,751.32 1364,776.32
  rectangle net GND: 1334.35,704.82 1364,729.82
  rectangle net GND: 1248.56,916.41 1290.79,941.41
  region net GND: 940.57,856.98 904.92,856.98 904.92,831.98 940.57,831.98
  region net GND: 995.57,767.03 995.57,785.03 924.61,785.03 924.61,767.03
  region net GND: 847.19,684.61 847.19,714.26 822.19,714.26 822.19,684.61
  rectangle net +3.3_OUT: 533.93,993.88 563.59,1018.88
  region net +3.3_OUT: 825.5,1116.61 795.85,1116.61 795.85,1091.61 825.5,1091.61
  rectangle net "LOW BATT": 1819.5,724.51 1860.3,749.51
  region net GND: 1500.1,372.54 1500.1,408.94 1475.1,408.94 1475.1,372.54
  region net GND: 1830.1,371.8 1830.1,408.2 1805.1,408.2 1805.1,371.8
  region net GND: 863.69,551.3 863.69,521.65 888.69,521.65 888.69,551.3
  region net GND: 817.19,551.3 817.19,521.65 842.19,521.65 842.19,551.3
  region net +3.3_OUT: 817.19,388 817.19,358.35 842.19,358.35 842.19,388
  region net GND: 984.77,360 955.11,360 955.11,335 984.77,335
  region net +3.3_OUT: 984.77,317.28 955.11,317.28 955.11,292.28 984.77,292.28
  rectangle net +3.3_OUT: 1954.5,194.5 1997.35,219.5
  rectangle net GND: 1990,1085.49 2019.65,1110.49
  rectangle net GND: 1990,1022.5 2019.65,1047.5
  rectangle net GND: 1990,959.51 2019.65,984.51
  rectangle net GND: 1819.5,850.49 1849.15,875.49
  rectangle net GND: 1819.5,787.5 1849.15,812.5
  region net GND: 1961.5,805.37 1931.85,805.37 1931.85,780.37 1961.5,780.37
  region net AVDD: 1961.5,855.02 1919.82,855.02 1919.82,830.02 1961.5,830.02
  rectangle net AVDD: 1334.35,464.51 1364,489.51
  rectangle net AVDD: 1334.35,533.33 1364,558.33
  rectangle net AVDD: 1334.35,581.32 1364,606.32
  rectangle net AVDD: 1334.35,651.82 1364,676.82
  rectangle net GND: 1080.79,1071.14 1189.21,1138.86
  rectangle net FL: 1915.46,326.52 1947.74,410
  rectangle net CH: 1585.46,326.52 1617.74,410
  rectangle net AVDD: 1170.86,242 1210.23,317.28
  rectangle net EN: 139.5,165.5 164.5,246.06
  rectangle net NetR20_1: 1904.81,1085.49 1971,1110.49
  rectangle net NetR19_1: 1904.81,1022.5 1971,1047.5
  rectangle net NetR17_1: 1904.81,959.51 1971,984.51
  rectangle net IO4: 1819.61,959.51 1885.81,984.51
  rectangle net WIFI: 1819.61,1022.5 1885.81,1047.5
  rectangle net ETHERNET: 1819.61,1085.49 1885.81,1110.49
  rectangle net NetLED1_2: 1719.38,724.51 1800.5,749.51
  rectangle net NetLED1_4: 1719.38,787.5 1800.5,812.5
  rectangle net NetLED1_6: 1719.38,850.49 1800.5,875.49
  rectangle net NetLED2_5: 1719.49,959.51 1800.61,984.51
  rectangle net NetLED2_3: 1719.49,1022.5 1800.61,1047.5
  rectangle net NetLED2_1: 1719.49,1085.49 1800.61,1110.49
  rectangle net NetC6_2: 1980.5,780.37 1998.5,855.02
  rectangle net AVDD: 1162.99,258.21 1270.68,353.11
  rectangle net AVDD: 1240.77,274.5 1270.77,352.74
  rectangle net IO13_RMII_EMAC_RX_ER: 751.18,406 842.19,427
  rectangle net EN: 1306.93,1095.11 1406,1113.11
  rectangle net IO0: 853.5,1095.11 963.07,1113.11
  region net nRST: 1003.77,360 1003.77,292.28 1021.77,292.28 1021.77,360
  rectangle net CLK50M: 1000.57,838.36 1095.7,885.61
  rectangle net CLK50M: 988.07,844.48 1013.07,900.89
  rectangle net VDDCR: 924.66,730.03 995.57,748.13
  rectangle net IO16_OSC_EN: 1154.76,916.41 1229.56,941.41
  rectangle net +3.3_OUT: 1154.76,844.48 1231.35,879.48
  rectangle net CLK50M: 1055.64,792.95 1080.64,861.98

## Silkscreen, mask and mechanical layers (free items; w line width, h text height)
Top Overlay:
  lines w5: 15.41,44.47 15.41,104.01 51,104.01
  text "BOOT" at 993.35,1021 h20
  text "RESET" at 1193.35,1021 h20
  text "TX" at 190,1018.34 h20 r90
  text "RX" at 289.2,1018.34 h20 r90
  text "EN" at 490,1014.34 h20 r90
  text "IO0" at 591.2,997.09 h20 r90
  text "GND" at 690.56,997.27 h20 r90
  text "3V3" at 390,995.35 h20 r90
  text "IO4" at 807.46,970.07 h20
  text "CLK50" at 952.44,944.35 h20 r90
  text "WIFI" at 795.83,852.91 h20
  text "FL" at 1914.95,449.76 h20
  text "CH" at 1584.55,449.49 h20
  text "ETH" at 803.03,193.27 h20
  text "LB" at 892.34,190.41 h20
  text "GND" at 965.09,190.41 h20
  text "AVDD" at 1154.71,188.69 h20
  text "10K" at 1426.76,188 h20
  text "0R" at 1682.06,188 h20
  text "10K" at 1756.76,188 h20
  text "0R" at 2006.06,188 h20
  text "ESP32" at 916.7,160 h20
  text "TP4056" at 1221.33,159.32 h20
  text "22R" at 1091.37,147.77 h20
  text "10K" at 775.39,147.36 h20
  text "220K" at 1413.27,135.37 h20
  text "220K" at 1743.27,135.37 h20
  text "0R" at 1682.06,133.5 h20
  text "0R" at 2006.06,133.5 h20
  text "470K" at 1414.04,79.01 h20
  text "0R" at 1682.06,79.01 h20
  text "470K" at 1744.04,79.01 h20
  text "0R" at 2006.06,79.01 h20
  text "10K" at 776.21,30.74 h20
  text "22R" at 1093.41,31.15 h20
  text "CHRG" at 872.35,21.58 h20
  text "STDBY" at 963,20.91 h20
  text "STDBY" at 1174.68,20.22 h20
  text "CHRG" at 1287.35,20.22 h20
Board Outline:
  the board outline again, w10